# EAGLE board measures_wrover_0.8_JLCPCB (EAGLE 9.6.2)
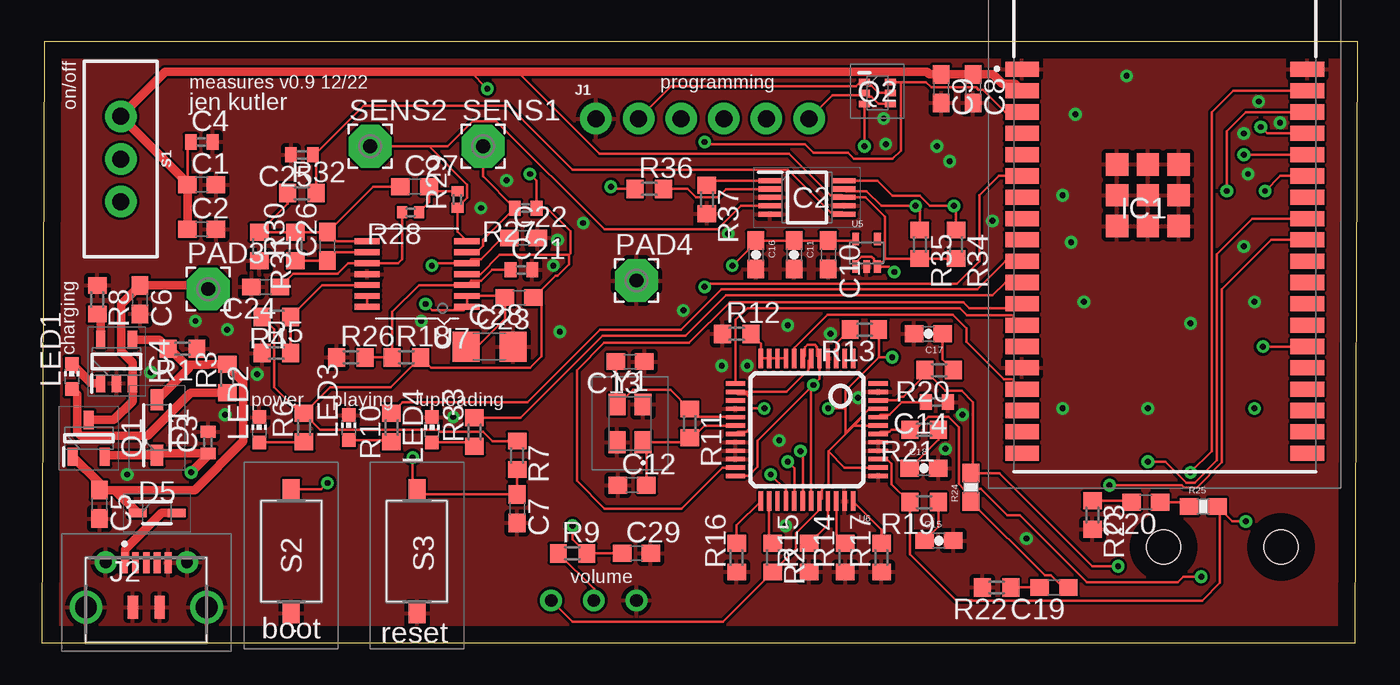
[diagram p0: board, top side]
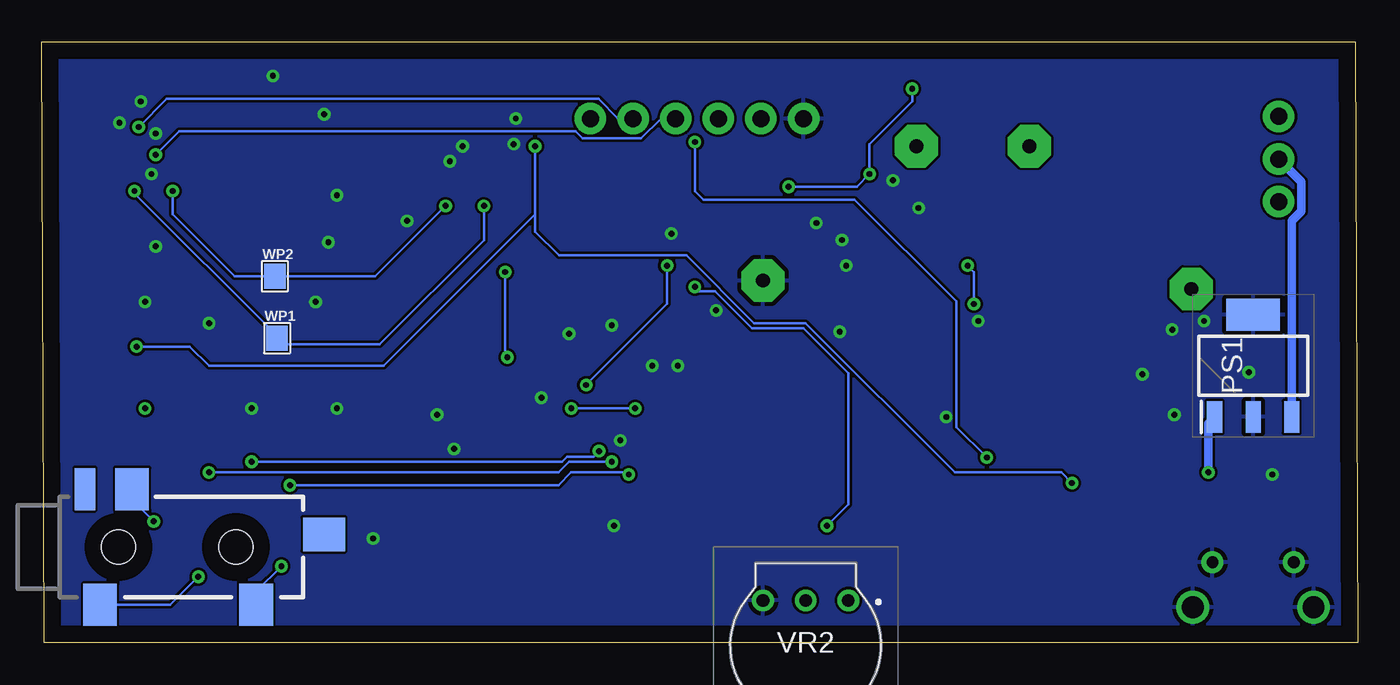
[diagram p1: board, bottom side, seen from below]

Size 78.41 x 35.8 mm. Coordinates in mm from the lower left corner, seen from the top.
Outline: 0,0 78.28,0 78.41,35.8 0.13,35.8 0,0
Copper layers (1*16): Top 0.035mm / dielectric 1.5mm / Bottom 0.035mm
Design rules "default": minimum track width 6mil, minimum drill 0.35mm, track to track 6mil, track to pad 6mil, pad to pad 6mil, via to via 6mil, smd to smd 6mil, copper to edge 40mil, drill to drill 6mil, minimum pad ring 10mil, minimum via ring 8mil, stop-mask expansion 4mil, vias tented up to drill 0mil, thermal gap 10mil

## Footprints (pad centres in the part's own frame; a part is rotated, then mirrored left to right if it is on the bottom)
C0603 = smd 1.1 x 1: 1 -0.85,0; 2 0.85,0
C0402 = smd 0.7 x 0.9: 1 -0.65,0; 2 0.65,0
0603-CAP = smd 1.1 x 1: 1 -0.85,0; 2 0.85,0
C1206 = smd 1.6 x 1.8: 1 -1.4,0; 2 1.4,0
SOD3716X125N = smd 1.25 x 0.75: 1 -1.65,0; 2 1.65,0
SOD2513X120N = smd 1.075 x 0.5: 1 -1.162,0; 2 1.162,0
ESP32WROVERE = smd 2 x 0.9: 1 -7.5,7.5; 2 -7.5,6.23; 3 -7.5,4.96; 4 -7.5,3.69; 5 -7.5,2.42; 6 -7.5,1.15; 7 -7.5,-0.12; 8 -7.5,-1.39; 9 -7.5,-2.66; 10 -7.5,-3.93; 11 -7.5,-5.2; 12 -7.5,-6.47; 13 -7.5,-7.74; 14 -7.5,-9.01; 15 -7.5,-10.28; 16 -7.5,-11.55; 17 -7.5,-12.82; 18 -7.5,-14.09; 19 -7.5,-15.36; 20 9.5,-15.36; 21 9.5,-14.09; 22 9.5,-12.82; 23 9.5,-11.55; 24 9.5,-10.28; 25 9.5,-9.01; 26 9.5,-7.74; 27 9.5,-6.47; 28 9.5,-5.2; 29 9.5,-3.93; 30 9.5,-2.66; 31 9.5,-1.39; 32 9.5,-0.12; 33 9.5,1.15; 34 9.5,2.42; 35 9.5,3.69; 36 9.5,4.96; 37 9.5,6.23; 38 9.5,7.5 | smd 1.33 x 1.33: 39 0,0; 40 -1.835,1.835; 41 -1.835,0; 42 -1.835,-1.835; 43 0,-1.835; 44 1.835,-1.835; 45 1.835,0; 46 1.835,1.835; 47 0,1.835
SOP50P490X110-10N = smd 1.4 x 0.3: 1 -2.2,1; 2 -2.2,0.5; 3 -2.2,0; 4 -2.2,-0.5; 5 -2.2,-1; 6 2.2,-1; 7 2.2,-0.5; 8 2.2,0; 9 2.2,0.5; 10 2.2,1
SOT95P280X100-5N = smd 1.05 x 0.55: 1 -1.3,0.95; 2 -1.3,0; 3 -1.3,-0.95; 4 1.3,-0.95; 5 1.3,0.95
1X06_NO_SILK = drill 1.016 pad 1.88: 1 0,0; 2 2.54,0; 3 5.08,0; 4 7.62,0; 5 10.16,0; 6 12.7,0
MICROXNJ = smd 0.4 x 1.25: 1 1.3,-4.775; 2 0.65,-4.775; 3 0,-4.775; 4 -0.65,-4.775; 5 -1.3,-4.775 | drill 0.7 pad 1.3: MH1 2.425,-4.8; MH2 -2.425,-4.8 | drill 1.3 pad 1.9: MH3 3.6,-2.13; MH4 -3.6,-2.13 | smd 0.6 x 1.35: MP1 0.8,-2.125; MP2 -0.8,-2.125
AUDIO-JACK-3.5MM-SMD = smd 2 x 2.5: RING 4.3,3.45; SLEEVE 2.4,-3.45; TIP 11.7,-3.45 | smd 1.2 x 2.5: RSH 1.5,3.45 | smd 2.5 x 2: TSH 15.75,0.75 | hole 2: 3.5,0; 10.5,0
CHIP-LED0603 = smd 0.8 x 0.8: A 0,-0.75; C 0,0.75
2,54/0,8 = drill 0.813 pad 2.54 octagon: 1 0,0
SOT230P700X180-4N = smd 1.9 x 0.9: 1 -3.05,2.3; 2 -3.05,0; 3 -3.05,-2.3 | smd 1.9 x 3.2: 4 3.05,0
SOT95P240X115-3N = smd 1.1 x 0.6: 1 -1.1,0.95; 2 -1.1,-0.95; 3 1.1,0
UMH3NTN = smd 0.65 x 0.4: 1 -0.775,0.65; 2 -0.775,0; 3 -0.775,-0.65; 4 0.775,-0.65; 5 0.775,0; 6 0.775,0.65
R0603 = smd 1 x 1.1: 1 -0.85,0; 2 0.85,0
0603-RES = smd 1.1 x 1: 1 -0.85,0; 2 0.85,0
R0402 = smd 0.7 x 0.9: 1 -0.65,0; 2 0.65,0
R0402' = smd 0.6 x 0.7: 1 -0.5,0; 2 0.5,0
SWITCH_SPDT_PTH_11.6X4.0MM = drill 1.016 pad 1.88: 1 0,2.54; 2 0,0; 3 0,-2.54
TS1101CW = smd 1.2 x 1: 1 -3.7,0; 2 3.7,0
SC70 = smd 0.4 x 0.75: 1 -0.65,-0.825; 2 0,-0.825; 3 0.65,-0.825; 4 0.65,0.825; 5 -0.65,0.825
LQFP-48 = smd 0.254 x 1.143: 1 -2.75,-4.25; 2 -2.25,-4.25; 3 -1.75,-4.25; 4 -1.25,-4.25; 5 -0.75,-4.25; 6 -0.25,-4.25; 7 0.25,-4.25; 8 0.75,-4.25; 9 1.25,-4.25; 10 1.75,-4.25; 11 2.25,-4.25; 12 2.75,-4.25; 25 2.75,4.25; 26 2.25,4.25; 27 1.75,4.25; 28 1.25,4.25; 29 0.75,4.25; 30 0.25,4.25; 31 -0.25,4.25; 32 -0.75,4.25; 33 -1.25,4.25; 34 -1.75,4.25; 35 -2.25,4.25; 36 -2.75,4.25 | smd 1.143 x 0.254: 13 4.25,-2.75; 14 4.25,-2.25; 15 4.25,-1.75; 16 4.25,-1.25; 17 4.25,-0.75; 18 4.25,-0.25; 19 4.25,0.25; 20 4.25,0.75; 21 4.25,1.25; 22 4.25,1.75; 23 4.25,2.25; 24 4.25,2.75; 37 -4.25,2.75; 38 -4.25,2.25; 39 -4.25,1.75; 40 -4.25,1.25; 41 -4.25,0.75; 42 -4.25,0.25; 43 -4.25,-0.25; 44 -4.25,-0.75; 45 -4.25,-1.25; 46 -4.25,-1.75; 47 -4.25,-2.25; 48 -4.25,-2.75
TSSOP14 = smd 0.35 x 1.5: 1 -1.95,-2.975; 2 -1.3,-2.975; 3 -0.65,-2.975; 4 0,-2.975; 5 0.65,-2.975; 6 1.3,-2.975; 7 1.95,-2.975; 8 1.95,2.975; 9 1.3,2.975; 10 0.65,2.975; 11 0,2.975; 12 -0.65,2.975; 13 -1.3,2.975; 14 -1.95,2.975
3352T1103LF = drill 0.76 pad 1.303: 1 0,0.01; 2 2.54,0.01; 3 5.08,0.01
WPAD-1-0805 = smd 1.3 x 1.5: 1 -0.015,0
SXT32422AA48 = smd 1 x 1.3: 1 -0.775,1.125; 2 -0.775,-1.125; 3 0.775,-1.125; 4 0.775,1.125

## Placement (x,y rotation side)
C1  10uF  [C0603]  9.52,27.3 0 top
C2  100nF  [C0603]  9.52,24.64 0 top
C3  1uF  [C0402]  9.91,11.94 90 top
C4  1uF  [C0402]  9.52,29.84 0 top
C5  10uF  [C0603]  3.43,8.26 270 top
C6  10uF  [C0603]  5.84,20.45 270 top
C7  100nF  [C0603]  28.32,8 270 top
C8  10uF  [C0603]  55.5,33.02 270 top
C9  100nF  [C0603]  53.59,33.02 270 top
C10  10uF  [C0603]  46.86,23.11 270 top
C11  0.1uF  [0603-CAP]  44.83,23.11 270 top
C12  22pF  [C0603]  35.18,9.4 0 top
C13  22pF  [C0603]  35.05,16.76 180 top
C14  1.0uF  [C0402]  53.34,14.35 180 top
C15  10nF  [0603-CAP]  53.47,6.1 0 top
C16  0.1uF  [0603-CAP]  42.55,23.11 270 top
C17  10nF  [0603-CAP]  52.83,18.41 180 top
C18  47nF  [0603-CAP]  52.58,10.41 0 top
C19  10uF  [C0603]  60.33,3.3 180 top
C20  10uF  [C0603]  65.79,8.38 180 top
C21  1uF  [C0402]  28.58,22.23 0 top
C22  100nF  [C0603]  28.7,24.13 0 top
C23  100nF  [C0603]  28.45,20.57 180 top
C24  1uF  [C0603]  13.34,21.21 180 top
C25  1uF  [C0402]  15.49,29.08 180 top
C26  1nF  [C0603]  17.02,23.62 90 top
C27  1uF  [C0603]  22.23,27.18 0 top
C28  47uF  [C1206]  26.67,17.65 0 top
C29  C_1UF/50V_0603  [C0603]  35.43,5.33 0 top
D1  B5819W  [SOD3716X125N]  6.86,12.83 90 top
D5  BAT760-7  [SOD2513X120N]  6.86,7.75 0 top
IC1  ESP32-WROVER-E  [ESP32WROVERE]  65.91,26.67 0 top
IC2  ADS1115IDGSR  [SOP50P490X110-10N]  45.59,26.54 0 top
IC4  TP4054-42-SOT25-R  [SOT95P280X100-5N]  4.45,16.76 90 top
J1  [1X06_NO_SILK]  33.02,31.24 0 top
J2  MICROXNJ  [MICROXNJ]  6.22,0 180 top
JP1  3.5mm Headphone Jack  [AUDIO-JACK-3.5MM-SMD]  77.34,5.71 0 bottom
LED1  Charge  [CHIP-LED0603]  1.78,15.88 0 top
LED2  Power  [CHIP-LED0603]  12.95,12.7 0 top
LED3  Power  [CHIP-LED0603]  18.29,12.83 0 top
LED4  Power  [CHIP-LED0603]  23.24,12.7 0 top
PAD3  [2,54/0,8]  9.91,21.08 0 top
PAD4  [2,54/0,8]  35.43,21.59 0 top
PS1  AP2114HA-3.3TRG1  [SOT230P700X180-4N]  6.22,16.51 90 bottom
Q1  CJ2301_S1  [SOT95P240X115-3N]  2.79,12.19 90 top
Q2  UMH3NTN  [UMH3NTN]  49.78,32.77 0 top
R1  100k  [R0603]  8.38,17.53 180 top
R2  100k  [R0603]  43.56,5.08 270 top
R3  2k  [R0603]  11.05,15.75 90 top
R4  100k  [R0603]  13.97,19.43 180 top
R5  100k  [R0603]  13.97,17.27 0 top
R6  2k  [R0603]  15.62,12.83 90 top
R7  10k  [R0603]  28.32,11.18 270 top
R8  2k  [R0603]  3.3,20.45 270 top
R9  R_150K_0603  [R0603]  31.62,5.33 0 top
R10  2k  [R0603]  20.83,12.83 90 top
R11  1M  [R0603]  38.61,13.08 270 top
R12  100k  [R0603]  41.4,18.41 0 top
R13  100k  [R0603]  49.02,18.67 180 top
R14  100k  [R0603]  47.88,5.08 90 top
R15  100k  [R0603]  45.72,5.08 90 top
R16  100k  [R0603]  41.4,5.08 90 top
R17  100k  [R0603]  50.04,5.08 90 top
R18  100k  [R0603]  21.72,17.02 0 top
R19  20  [R0603]  52.58,8.38 180 top
R20  20  [R0603]  53.47,16.26 180 top
R21  10  [R0603]  52.58,12.7 180 top
R22  10K  [R0603]  56.9,3.3 180 top
R23  10K  [R0603]  62.61,7.62 270 top
R24  470  [0603-RES]  55.37,9.27 90 top
R25  470  [0603-RES]  69.22,8.13 0 top
R26  100k  [R0603]  18.41,17.02 0 top
R27  825k  [R0402]  28.83,25.91 180 top
R28  150k  [R0402']  21.97,25.65 180 top
R29  75k  [R0402']  24.77,26.42 90 top
R30  10k  [R0603]  15.11,23.62 90 top
R31  10k  [R0603]  12.95,23.62 270 top
R32  110k  [R0603]  15.49,26.8 0 top
R33  2k  [R0603]  25.78,12.57 90 top
R34  10k  [R0603]  54.48,23.75 270 top
R35  10k  [R0603]  52.32,23.75 270 top
R36  10k  [R0603]  36.2,27.05 0 top
R37  10k  [R0603]  39.62,26.42 270 top
S1  [SWITCH_SPDT_PTH_11.6X4.0MM]  4.7,28.83 180 top
S2  TS-1101-C-W  [TS1101CW]  14.86,5.46 90 top
S3  TS-1101-C-W  [TS1101CW]  22.35,5.46 90 top
SENS1  [2,54/0,8]  26.29,29.59 0 top
SENS2  [2,54/0,8]  19.56,29.59 0 top
U5  1.8V  [SC70]  49.15,23.24 0 top
U6  VS1053  [LQFP-48]  45.59,12.7 180 top
U7  AD8608ARUZ  [TSSOP14]  22.35,21.97 90 top
VR2  3352T-1-103LF  [3352T1103LF]  30.35,2.54 180 bottom
WP1  SDA21  [WPAD-1-0805]  64.39,18.16 0 bottom
WP2  SCL22  [WPAD-1-0805]  64.52,21.84 0 bottom
Y1  SXT32422AA48  [SXT32422AA48]  35.05,13.08 180 top

## Library data of the parts
C1 C5 C6 C8 C10 C19 C20 = JLC PCB Basic Parts_loc; LCSC_DATASHEET: https://datasheet.lcsc.com/lcsc/1811110921_Samsung-Electro-Mechanics-CL10A106MA8NRNC_C96446.pdf; LCSC_PART: C96446; LCSC_ROTATION_CCW: 0; LCSC_STOCK: 119091; PROPERTIES: X5R 25V ±20% 10uF 0603 ROHS
C2 C7 C9 C22 C23 = JLC PCB Basic Parts_loc; LCSC_DATASHEET: https://datasheet.lcsc.com/lcsc/1809301912_YAGEO-CC0603KRX7R9BB104_C14663.pdf; LCSC_PART: C14663; LCSC_ROTATION_CCW: 0; LCSC_STOCK: 7111530; PROPERTIES: 50V 100nF X7R ±10% 0603 ROHS
C3 C4 C14 C21 C25 = JLC PCB Basic Parts_loc; LCSC_DATASHEET: https://datasheet.lcsc.com/lcsc/1811091611_Samsung-Electro-Mechanics-CL05A105KA5NQNC_C52923.pdf; LCSC_PART: C52923; LCSC_ROTATION_CCW: 0; LCSC_STOCK: 6404174; PROPERTIES: 25V 1uF X5R ±10% 0402 ROHS
C11 C16 = SparkFun-Capacitors; PROD_ID: CAP-00810
C12 C13 = JLC PCB Basic Parts_loc; LCSC_DATASHEET: https://datasheet.lcsc.com/lcsc/1810261515_Samsung-Electro-Mechanics-CL10C120JB8NNNC_C38523.pdf; LCSC_PART: C38523; LCSC_ROTATION_CCW: 0; LCSC_STOCK: 87030; PROPERTIES: 50V 12pF C0G ±5% 0603 ROHS
C15 C17 = SparkFun-Capacitors; PROD_ID: CAP-00867
C18 = SparkFun-Capacitors; PROD_ID: CAP-08605
C24 C27 C29 = JLC PCB Basic Parts_loc; LCSC_DATASHEET: https://datasheet.lcsc.com/lcsc/1810261812_Samsung-Electro-Mechanics-CL10A105KB8NNNC_C15849.pdf; LCSC_PART: C15849; LCSC_ROTATION_CCW: 0; LCSC_STOCK: 14650365; PROPERTIES: 50V 1uF X5R ±10% 0603 ROHS
C26 = JLC PCB Basic Parts_loc; LCSC_DATASHEET: https://datasheet.lcsc.com/lcsc/1811071810_Samsung-Electro-Mechanics-CL10B102KB8NNNC_C1588.pdf; LCSC_PART: C1588; LCSC_ROTATION_CCW: 0; LCSC_STOCK: 2243141; PROPERTIES: 50V 1nF X7R ±10% 0603 ROHS
C28 = JLC PCB Basic Parts_loc; LCSC_DATASHEET: https://datasheet.lcsc.com/lcsc/1810221121_Samsung-Electro-Mechanics-CL31A476MPHNNNE_C96123.pdf; LCSC_PART: C96123; LCSC_ROTATION_CCW: 0; LCSC_STOCK: 279828; PROPERTIES: 10V 47uF X5R ±20% 1206 ROHS
D1 = B5819W; DESCRIPTION: 40V 1A 600mV @ 1A SOD-123 Schottky Barrier Diodes (SBD); HEIGHT: 1.25mm; MANUFACTURER_NAME: Changjiang Electronics Tech (CJ); MANUFACTURER_PART_NUMBER: B5819W
D5 = BAT760-7; ARROW_PART_NUMBER: BAT760-7; ARROW_PRICE-STOCK: https://www.arrow.com/en/products/bat760-7/diodes-incorporated?region=europe; DESCRIPTION: Diode Schottky 30V 1A 2Pin SOD323 Diodes Inc BAT760-7, SMT Schottky Diode, 30V 1A, 2-Pin SOD-323; HEIGHT: 1.2mm; MANUFACTURER_NAME: Diodes Inc.; MANUFACTURER_PART_NUMBER: BAT760-7; MOUSER_PART_NUMBER: 621-BAT760-7; MOUSER_PRICE-STOCK: https://www.mouser.co.uk/ProductDetail/Diodes-Incorporated/BAT760-7?qs=JV7lzlMm3yKDDyO09xoRbQ%3D%3D
IC1 = ESP32-WROVER-E; DESCRIPTION: Module: IoT; Bluetooth Low Energy,WiFi; PCB; SMD; 18x31.4x3.3mm; HEIGHT: 3.45mm; MANUFACTURER_NAME: Espressif Systems; MANUFACTURER_PART_NUMBER: ESP32-WROVER-E
IC2 = ADS1115IDGSR; ARROW_PART_NUMBER: ADS1115IDGSR; ARROW_PRICE-STOCK: https://www.arrow.com/en/products/ads1115idgsr/texas-instruments?region=nac; DESCRIPTION: 16-Bit 860SPS 4-Ch Delta-Sigma ADC With PGA, Oscillator, Vref, Comparator, and I2C; HEIGHT: 1.1mm; MANUFACTURER_NAME: Texas Instruments; MANUFACTURER_PART_NUMBER: ADS1115IDGSR; MOUSER_PART_NUMBER: 595-ADS1115IDGSR; MOUSER_PRICE-STOCK: https://www.mouser.co.uk/ProductDetail/Texas-Instruments/ADS1115IDGSR?qs=IK5e5L0zOXjKCJoVMhYO%2FQ%3D%3D
IC4 = TP4054-42-SOT25-R; DESCRIPTION: Standalone Linear Li-ion Battery Charger with Thermal Regulation, SOT-23-5; HEIGHT: 1mm; MANUFACTURER_NAME: TOP POWER; MANUFACTURER_PART_NUMBER: TP4054-42-SOT25-R
J1 = SparkFun-Connectors; PROD_ID: CONN-08437
J2 = MICROXNJ; DESCRIPTION: MICRO-USB-SMD_MICROXNJ; HEIGHT: 2.425mm; MANUFACTURER_NAME: Shou Han; MANUFACTURER_PART_NUMBER: MICROXNJ
JP1 = SparkFun-Connectors; PROD_ID: CONN-10353
LED1-LED4 R27 = adafruit
PAD3 PAD4 SENS1 SENS2 = wirepad
PS1 = AP2114HA-3.3TRG1; ARROW_PART_NUMBER: AP2114HA-3.3TRG1; ARROW_PRICE-STOCK: https://www.arrow.com/en/products/ap2114ha-3.3trg1/diodes-incorporated; DESCRIPTION: LDO Voltage Regulators 1A LN CMOS LDO 0.45V 60uA 50mA; HEIGHT: 1.8mm; MANUFACTURER_NAME: Diodes Inc.; MANUFACTURER_PART_NUMBER: AP2114HA-3.3TRG1; MOUSER_PART_NUMBER: 621-AP2114HA-3.3TRG1; MOUSER_PRICE-STOCK: https://www.mouser.co.uk/ProductDetail/Diodes-Incorporated/AP2114HA-33TRG1?qs=M%2FOdCRO8QQ3KWhA9Gt6VoQ%3D%3D
Q1 = CJ2301_S1; DESCRIPTION: MOSFET P Trench 20V 2.3A 1V @ 250uA 112 m @ 2.8A,4.5V SOT-23(SOT-23-3) RoHS; HEIGHT: 1.15mm; MANUFACTURER_NAME: Changjiang Electronics Tech (CJ); MANUFACTURER_PART_NUMBER: CJ2301 S1
Q2 = UMH3NTN; ARROW_PART_NUMBER: UMH3NTN; ARROW_PRICE-STOCK: https://www.arrow.com/en/products/umh3ntn/rohm-semiconductor?region=nac; DESCRIPTION: Bipolar Transistors - Pre-Biased DUAL NPN 50V 100MA SOT-363; HEIGHT: 1mm; MANUFACTURER_NAME: ROHM Semiconductor; MANUFACTURER_PART_NUMBER: UMH3NTN; MOUSER_PART_NUMBER: 755-UMH3NTN; MOUSER_PRICE-STOCK: https://www.mouser.co.uk/ProductDetail/ROHM-Semiconductor/UMH3NTN?qs=4kLU8WoGk0st6ahJ6z2bmw%3D%3D
R1 R2 R4 R5 R12-R18 R26 = JLC PCB Basic Parts_loc; LCSC_DATASHEET: https://datasheet.lcsc.com/lcsc/2110260030_UNI-ROYAL-Uniroyal-Elec-0603WAF1003T5E_C25803.pdf; LCSC_PART: C25803; LCSC_ROTATION_CCW: 0; LCSC_STOCK: 5826279; PROPERTIES: ±1% 1/10W Thick Film Resistors 75V ±100ppm -55°C~+155°C 100kOhm 0603 ROHS
R3 R6 R8 R10 R33 = JLC PCB Basic Parts_loc; LCSC_DATASHEET: https://datasheet.lcsc.com/lcsc/2110252130_UNI-ROYAL-Uniroyal-Elec-0603WAF2001T5E_C22975.pdf; LCSC_PART: C22975; LCSC_ROTATION_CCW: 0; LCSC_STOCK: 3372290; PROPERTIES: ±1% 1/10W Thick Film Resistors 75V ±100ppm -55°C~+155°C 2kOhm 0603 ROHS
R7 R22 R23 R30 R31 R34-R37 = JLC PCB Basic Parts_loc; LCSC_DATASHEET: https://datasheet.lcsc.com/lcsc/2110260030_UNI-ROYAL-Uniroyal-Elec-0603WAF1002T5E_C25804.pdf; LCSC_PART: C25804; LCSC_ROTATION_CCW: 0; LCSC_STOCK: 7979018; PROPERTIES: ±1% 1/10W Thick Film Resistors 75V ±100ppm -55°C~+155°C 10kOhm 0603 ROHS
R9 = JLC PCB Basic Parts_loc; LCSC_DATASHEET: https://datasheet.lcsc.com/lcsc/2110252030_UNI-ROYAL-Uniroyal-Elec-0603WAF1503T5E_C22807.pdf; LCSC_PART: C22807; LCSC_ROTATION_CCW: 0; LCSC_STOCK: 285183; PROPERTIES: ±1% 1/10W Thick Film Resistors 75V ±100ppm -55°C~+155°C 150kOhm 0603 ROHS
R11 = JLC PCB Basic Parts_loc; LCSC_DATASHEET: https://datasheet.lcsc.com/lcsc/2110252030_UNI-ROYAL-Uniroyal-Elec-0603WAF1004T5E_C22935.pdf; LCSC_PART: C22935; LCSC_ROTATION_CCW: 0; LCSC_STOCK: 1411723; PROPERTIES: ±1% 1/10W Thick Film Resistors 75V ±100ppm -55°C~+155°C 1MOhm 0603 ROHS
R19 R20 = JLC PCB Basic Parts_loc; LCSC_DATASHEET: https://datasheet.lcsc.com/lcsc/2110252030_UNI-ROYAL-Uniroyal-Elec-0603WAF200JT5E_C22950.pdf; LCSC_PART: C22950; LCSC_ROTATION_CCW: 0; LCSC_STOCK: 40713; PROPERTIES: ±1% 1/10W Thick Film Resistors 75V ±100ppm -55°C~+155°C 20Ohm 0603 ROHS
R21 = JLC PCB Basic Parts_loc; LCSC_DATASHEET: https://datasheet.lcsc.com/lcsc/2110252030_UNI-ROYAL-Uniroyal-Elec-0603WAF100JT5E_C22859.pdf; LCSC_PART: C22859; LCSC_ROTATION_CCW: 0; LCSC_STOCK: 2733989; PROPERTIES: ±1% 1/10W Thick Film Resistors 75V ±400ppm -55°C~+155°C 10Ohm 0603 ROHS
R24 R25 = SparkFun-Resistors; PROD_ID: RES-07869
R28 = JLC PCB Basic Parts_loc; LCSC_DATASHEET: https://datasheet.lcsc.com/lcsc/2110260030_UNI-ROYAL-Uniroyal-Elec-0402WGF1503TCE_C25755.pdf; LCSC_PART: C25755; LCSC_ROTATION_CCW: 0; LCSC_STOCK: 128267; PROPERTIES: ±1% 1/16W Thick Film Resistors 50V ±100ppm -55°C~+155°C 150kOhm 0402 ROHS
R29 = JLC PCB Basic Parts_loc; LCSC_DATASHEET: https://datasheet.lcsc.com/lcsc/2110260030_UNI-ROYAL-Uniroyal-Elec-0402WGF7502TCE_C25798.pdf; LCSC_PART: C25798; LCSC_ROTATION_CCW: 0; LCSC_STOCK: 100400; PROPERTIES: ±1% 1/16W Thick Film Resistors 50V ±100ppm -55°C~+155°C 75kOhm 0402 ROHS
R32 = JLC PCB Basic Parts_loc; LCSC_DATASHEET: https://datasheet.lcsc.com/lcsc/2110260030_UNI-ROYAL-Uniroyal-Elec-0603WAF1103T5E_C25805.pdf; LCSC_PART: C25805; LCSC_ROTATION_CCW: 0; LCSC_STOCK: 86411; PROPERTIES: ±1% 1/10W Thick Film Resistors 75V ±100ppm -55°C~+155°C 110kOhm 0603 ROHS
S1 = SparkFun-Switches; PROD_ID: SWCH-08261; SF_SKU: COM-00102
S2 S3 = TS-1101-C-W; DESCRIPTION: tact switch 3x6x2.5 stick flat foot white button 260GF; HEIGHT: 2.6mm; MANUFACTURER_NAME: XKB Connectivity; MANUFACTURER_PART_NUMBER: TS-1101-C-W
U5 = SparkFun-PowerIC; PROD_ID: VREG-08428
U6 = SparkFun-DigitalIC; PROD_ID: IC-08983
U7 = AD8608ARUZ; AVAILABILITY: In Stock; DESCRIPTION: CMOS Amplifier 4 Circuit Rail-to-Rail 14-TSSOP; MF: Analog Devices; MP: AD8608ARUZ; PACKAGE: TSSOP-14 Analog Devices; PRICE: None
VR2 = 3352T-1-103LF; ARROW_PART_NUMBER: 3352T-1-103LF; ARROW_PRICE-STOCK: https://www.arrow.com/en/products/3352t-1-103lf/bourns; DESCRIPTION: Trimmer Resistors - Through Hole; HEIGHT: 5.33mm; MANUFACTURER_NAME: Bourns; MANUFACTURER_PART_NUMBER: 3352T-1-103LF; MOUSER_PART_NUMBER: 652-3352T-1-103LF; MOUSER_PRICE-STOCK: https://www.mouser.co.uk/ProductDetail/Bourns/3352T-1-103LF?qs=EYTJzGwugUoW6t2SAeQ12A%3D%3D
WP1 WP2 = PatternAgents-ProtoPads; BOM: EXCLUDE
Y1 = SXT32422AA48; DESCRIPTION: 32MHz +/-50ppm Crystal 22pF 40 Ohms 4-SMD, No Lead; HEIGHT: 0.8mm; MANUFACTURER_NAME: Suntsu; MANUFACTURER_PART_NUMBER: SXT32422AA48

## Nets
1.8V: C10.1 C11.1 C16.1 U5.5 U6.5 U6.7 U6.24 U6.31
3.3V: C1.1 C2.1 C4.1 C8.1 C9.1 C23.1 IC1.2 IC2.8 R2.2 R4.2 R6.2 R7.1 R13.1 R18.2 R27.1 R34.2 R35.2 R36.1 S1.3 U5.1 U5.3 U6.6 U6.14 U6.19 U6.32 U6.38 U6.43 U6.45 U7.4 VR2.1
AIN0: IC2.4 R29.1 SENS2.1 U7.7
AIN1: C25.1 IC2.6 R32.2
DTR: J1.6 Q2.2 Q2.4
G1: R12.2 U6.9 U6.10 U6.11 U6.12
G2: R16.2 U6.25
GBUF: JP1.SLEEVE R21.2 U6.42
GND: C1.2 C2.2 C3.2 C4.2 C5.2 C6.2 C7.2 C8.2 C9.2 C10.2 C11.2 C12.1 C13.1 C14.1 C15.2 C16.2 C17.2 C18.2 C21.2 C22.2 C24.2 C25.2 C28.2 C29.2 IC1.1 IC1.15 IC1.38 IC1.39 IC1.40 IC1.41 IC1.42 IC1.43 IC1.44 IC1.45 IC1.46 IC1.47 IC2.3 IC2.5 IC2.7 IC4.2 J1.1 J2.5 J2.MH1 J2.MH2 J2.MH3 J2.MH4 J2.MP1 J2.MP2 LED2.C LED3.C LED4.C PAD4.1 PS1.2 PS1.4 R1.1 R5.1 R8.1 R12.1 R14.1 R15.1 R16.1 R17.1 R22.2 R23.2 R26.1 R31.2 R37.2 S2.1 S3.1 U5.2 U6.4 U6.16 U6.20 U6.21 U6.22 U6.35 U6.37 U6.40 U6.41 U6.47 U7.11 VR2.3 Y1.2 Y1.4
GPIO0: R15.2 U6.33
GPIO1: R14.2 U6.34
GPIO4: R17.2 U6.36
I35: IC1.7
IO0: IC1.25 Q2.3 S2.2
IO21: IC1.33 IC2.9 R35.1 WP1.1
IO22: IC1.36 IC2.10 R34.1 WP2.1
LEFT: JP1.TIP R20.2 R24.2 U6.46
MIDI-RX: R2.1 U6.26
MISO: IC1.31 U6.30
MOSI: IC1.37 U6.29
MP3-CS: IC1.12 U6.23
MP3-DCS: IC1.13 U6.13
MP3-DREQ: IC1.16 U6.8
MP3-RST: R13.2 U6.3
N$1: PS1.3 S1.2
N$2: C3.1 D1.1 PS1.1 Q1.2
N$3: LED2.A R6.1
N$4: IC4.1 LED1.C
N$5: LED1.A R3.1
N$6: D5.2 J2.1
N$7: IC4.5 R8.2
N$8: R9.1 VR2.2
N$9: R4.1 R5.2 U7.12
N$10: U7.13 U7.14
N$11: IC1.10 R10.2
N$12: IC1.11 R33.2
N$13: C12.2 R11.2 U6.18 Y1.1
N$14: C13.2 R11.1 U6.17 Y1.3
N$15: C18.1 R21.1
N$16: C17.1 R20.1
N$17: C15.1 R19.1
N$18: C20.1 R25.1
N$19: C19.1 R24.1
N$20: C21.1 R18.1 R26.2 U7.3
N$21: C22.1 C23.2 C28.1 U7.1 U7.2 U7.5
N$22: R27.2 SENS1.1 U7.6
N$23: C24.1 R28.2 U7.10
N$24: C26.2 C27.1 R30.2 R31.1 R32.1 U7.8
N$25: C26.1 R30.1 U7.9
N$26: C27.2 R28.1 R29.2
N$27: LED3.A R10.1
N$28: LED4.A R33.1
N$29: IC2.2 R36.2
N$30: IC2.1 R37.1
RCAP: C14.2 U6.44
RESET: C7.1 IC1.3 Q2.6 R7.2 S3.2
RIGHT: JP1.RING R19.2 R25.2 U6.39
RTS: J1.2 Q2.1 Q2.5
RX: IC1.34 J1.4
SCK: IC1.30 U6.28
SPKR-L: C19.2 R22.1
SPKR-R: C20.2 R23.1
TX: IC1.35 J1.5
V_BATT: C6.1 IC4.3 PAD3.1 Q1.3
V_USB: C5.1 D1.2 D5.1 IC4.4 Q1.1 R1.2 R3.2
VOL: C29.1 IC1.6 R9.2

## Tracks (layer width: path | path; a pad name or v marks a point on that pad's centre or on a via)
1.8V  (via drill 0.35)
  Top 0.152: U5.5 48.4,23.96 C10.1 C11.1 42.63,23.96 42.55,23.88 | U6.7 45.49,17.09 45.49,17.62 45.62,17.75 46.06,17.75 46.2,17.62 46.2,17.09 U6.5 46.34,15.74 v45.97,15.37 | v45.97,15.37 45.84,15.24 U6.31 | v45.97,15.37 42.65,12.04 42.65,10.48 42.14,9.97 41.36,9.97 U6.24 | v41.15,22.48 42.55,23.88 | 42.55,23.88 C16.1
  Bottom 0.152: v41.15,22.48 41.15,20.19 v45.97,15.37
3.3V  (via drill 0.35)
  Top 0.152: U6.38 47.84,10.45 46.86,11.43 | 46.86,11.43 48.38,12.95 | 48.38,12.95 U6.43 | 48.38,12.95 49.04,13.61 49.04,13.67 | 49.04,13.67 47.9,12.53 47.9,13.97 | 49.04,13.67 49.32,13.95 U6.45 | 46.86,11.43 46.86,9.49 46.49,9.12 46.49,8.59 U6.32 46.34,7.93 44.94,6.53 44.94,5.61 R2.2 40.6,1.27 31.61,1.27 VR2.1 | U6.19 41.49,12.59 42.01,12.59 42.14,12.73 42.14,13.97 | 42.14,13.97 42.14,14.67 42.01,14.81 41.49,14.81 U6.14 44.36,14.95 45.7,16.28 45.7,16.81 U6.6 | U5.3 49.58,22.64 49.58,22.89 49.44,23.02 48.85,23.02 48.5,22.66 U5.1 | U5.3 50.23,22.84 50.23,25.4 49.09,26.54 IC2.8 47.67,26.66 47,26.66 44.53,29.13 33.22,29.13 28.34,34.02 27.81,34.02 | U5.3 50.28,22.9 R35.2 R34.2 | U7.4 26.14,21.97 27.29,23.11 31.41,23.11 | R4.2 13.85,18.7 13.85,16.63 13.84,16.62 13.84,15.24 15.41,13.68 R6.2 | R6.2 17.18,15.24 20.79,15.24 R18.2 23.2,16.38 29.08,16.38 29.78,17.08 29.78,20.09 C23.1 30.6,21.87 30.73,21.87 31.41,22.55 31.41,23.11 | 49.87,17.01 R13.1 | 49.87,17.01 47.9,15.04 47.9,13.97 | R7.1 26.85,12.03 26.3,12.58 23.74,12.58 23.61,12.71 16.59,12.71 R6.2 | 25.27,34.02 25.54,34.02 v26.54,33.02 | v33.91,27.18 34.04,27.05 R36.1 | v29.08,27.94 29.48,27.54 R27.1 30.11,25.91 31.5,24.53 31.5,23.2 31.41,23.11 | C1.1 8.68,29.64 C4.1 | v43.05,13.97 42.14,13.97 | v46.86,13.97 47.9,13.97 | v50.67,17.02 v50.66,17.01 49.87,17.01 | U5.3 50.48,22.42 v50.8,22.1
  Top 0.508: C2.1 C1.1 8.68,27.39 S1.3 7.35,34.02 25.27,34.02 27.81,34.02 52.75,34.02 52.9,33.87 C9.1 C8.1 56.69,33.87 57.25,33.31 58,33.31 IC1.2
  Bottom 0.152: v26.54,33.02 26.54,32.26 29.08,29.72 v29.08,27.94 29.84,27.18 v33.91,27.18 | v43.05,13.97 v46.86,13.97 | v50.8,22.1 50.8,17.14 v50.67,17.02
AIN0
  Top 0.152: U7.7 24.77,24.48 R29.1 24.77,25.94 25.34,26.52 25.34,27.31 23.06,29.59 SENS2.1 24.17,29.59 25.67,31.09 27.08,31.09 33.53,24.64 40.26,24.64 41.66,26.04 IC2.4
AIN1
  Top 0.152: C25.1 16.2,29.03 | 16.2,29.03 16.34,28.88 R32.2 | 16.2,29.03 19.18,32 27.81,32 31.62,28.19 44.47,28.19 47,25.66 47.67,25.66 IC2.6
DTR
  Top 0.152: J1.6 47.12,32.64 48.88,32.64 Q2.2 49.23,32.55 49.43,32.55 49.86,32.12 Q2.4
G1
  Top 0.152: R12.2 42.84,17.82 U6.12 U6.10 | U6.11 U6.10 | U6.10 U6.9
G2
  Top 0.152: U6.25 41.4,7.01 R16.2
GBUF  (via drill 0.35)
  Top 0.152: U6.42 49.99,12.59 50.51,12.59 50.61,12.7 R21.2 52.06,12.7 52.83,13.48 54.02,13.48 54.64,12.86 54.64,9.48 54.92,9.2 55.97,9.2 57.55,7.62 58.29,7.62 62.29,3.62 67.71,3.62 68.02,3.94 v69.09,3.94
  Bottom 0.152: JP1.SLEEVE 70.76,2.27 v69.09,3.94
GND  (via drill 0.35)
  other vias: 71.88,27.94 46.99,18.41 10.92,13.59 24.51,13.46 5.08,10.03 6.48,16.13 22.61,19.18 26.16,25.91 44.32,6.99 43.94,12.06 53.85,11.56 54.86,13.59 38.23,19.81 50.17,31.24 27.69,27.56 30.73,24 30.48,22.48 58.67,6.22 56.64,25.15 44.45,18.92 42.04,16.51 72.52,32.26 71.63,30.35 71.63,23.62 73.79,30.99 32.26,25.02 30.86,18.54 40.89,24.38 48.64,14.61 40.51,16.51 9.14,19.18 11.05,18.67 12.83,16 50.29,29.72 53.34,29.59 54.1,28.7 64.64,33.78 61.59,31.5 60.83,26.67 61.34,23.88 62.1,20.32 68.45,19.05 72.26,20.32 60.83,13.97 65.91,13.97
  pour Top: -0.13,35.56 78.61,35.56 78.61,0 -0.13,0
  pour Bottom: -0.13,35.56 78.61,35.56 78.61,0 -0.13,0
GPIO0
  Top 0.152: U6.33 46.84,7.05 R15.2
GPIO1
  Top 0.152: U6.34 47.34,6.47 R14.2
GPIO4
  Top 0.152: U6.36 50.04,6.75 R17.2
IO0  (via drill 0.35)
  Top 0.152: Q2.3 49.02,32.1 v49.02,29.59 | IC1.25 v72.78,17.66 v72.77,17.65 | S2.2 16.65,9.16 v17.02,9.53
  Bottom 0.152: v72.77,17.65 69.6,17.65 68.45,16.51 58.04,16.51 49.02,25.53 | v49.02,29.59 49.02,25.53 | 49.02,25.53 49.02,24.51 47.6,23.09 40.01,23.09 35.97,19.05 32.89,19.05 24,10.16 17.65,10.16 v17.02,9.53
IO21  (via drill 0.35)
  Top 0.152: IC1.33 73.79,27.82 v72.9,26.92 | R35.1 52.32,25.78 v52.07,26.04 50.02,26.04 49.14,26.92 47.91,26.92 IC2.9
  Bottom 0.152: v72.9,26.92 72.9,26.8 64.4,18.3 WP1.1 64.02,17.78 58.29,17.78 52.07,24 v52.07,26.04
IO22  (via drill 0.35)
  Top 0.152: IC1.36 71.76,31.63 70.61,30.48 v70.61,26.92 | R34.1 54.48,25.91 v54.36,26.04 52.93,26.04 52.32,26.64 50.7,26.64 49.8,27.54 IC2.10
  Bottom 0.152: v70.61,26.92 70.61,25.53 66.93,21.84 WP2.1 58.55,21.84 v54.36,26.04
LEFT  (via drill 0.35)
  Top 0.152: 52.79,16.09 53.84,15.03 54.82,15.03 55.5,14.35 55.5,10.25 R24.2 57.06,10.12 62.61,4.57 v64.14,4.57 | 52.79,16.09 R20.2 | U6.46 50.93,14.45 51.14,14.66 51.36,14.66 52.79,16.09
  Bottom 0.152: JP1.TIP 65.64,3.06 v64.14,4.57
MIDI-RX
  Top 0.152: U6.26 43.34,6.15 R2.1
MISO  (via drill 0.35)
  Top 0.152: U6.30 45.34,11.3 v45.21,11.43 | IC1.31 72.14,25.28 70.03,23.16 70.03,10.88 68.7,9.55 68.2,9.55 66.96,10.79 v65.91,10.79
  Bottom 0.152: v65.91,10.79 47.42,10.79 47.12,11.1 45.54,11.1 v45.21,11.43
MOSI  (via drill 0.35)
  Top 0.152: IC1.37 71,32.9 69.72,31.62 69.72,11.43 v68.45,10.16 | U6.29 44.84,10.4 v44.45,10.79
  Bottom 0.152: v68.45,10.16 47.62,10.16 46.99,10.79 v44.45,10.79
MP3-CS
  Top 0.152: IC1.12 58.16,19.95 55.28,19.95 54.92,20.3 41,20.3 38.58,17.87 33.5,17.87 31.88,16.26 31.88,9.65 33.53,8 38.12,8 40.55,10.43 41.33,10.43 U6.23
MP3-DCS
  Top 0.152: IC1.13 57.82,19.52 55.14,19.52 54.72,19.94 42.04,19.94 41.34,19.25 U6.13
MP3-DREQ
  Top 0.152: IC1.16 57.82,15.71 57.32,15.71 55.1,17.93 55.1,18.76 54.29,19.56 46.8,19.56 44.84,17.6 U6.8
MP3-RST
  Top 0.152: R13.2 47.34,17.84 U6.3
N$1
  Bottom 0.508: PS1.3 3.92,25.16 3.35,25.73 3.35,27.48 S1.2
N$2  (via drill 0.35)
  Top 0.508: Q1.2 3.83,11.18 D1.1 6.97,11.29 C3.1 9.91,11.18 v8.89,10.16
  Bottom 0.508: PS1.1 8.89,13.09 v8.89,10.16
N$3
  Top 0.152: LED2.A 15.59,11.95 R6.1
N$4
  Top 0.508: IC4.1 2.94,15.46 LED1.C
N$5
  Top 0.508: R3.1 8.85,14.9 6.29,12.34 2.33,12.34 2.09,12.57 2.09,14.81 LED1.A
N$6
  Top 0.508: J2.1 4.97,4.82 4.97,5.57 7.15,7.75 D5.2
N$7
  Top 0.508: IC4.5 3.5,19.4 R8.2
N$8
  Top 0.152: R9.1 32.89,3.21 VR2.2
N$9
  Top 0.152: R5.2 R4.1 16.71,21.32 U7.12
N$10
  Top 0.152: U7.14 U7.13
N$11
  Top 0.152: IC1.10 57.41,22.74 55.75,21.08 40.51,21.08 38.1,18.67 33.27,18.67 28.96,14.35 21.5,14.35 R10.2
N$12
  Top 0.152: IC1.11 57.41,21.47 56.64,20.7 40.77,20.7 38.35,18.29 33.4,18.29 28.54,13.42 R33.2
N$13
  Top 0.152: U6.18 39.49,12.95 38.77,12.23 R11.2 38.33,11.96 Y1.1 36.03,11.75 C12.2
N$14
  Top 0.152: U6.17 41.33,13.47 39.03,13.47 38.61,13.88 R11.1 37.45,15.09 35.23,15.09 34.35,14.21 Y1.3 34.2,14.28 C13.2
N$15
  Top 0.152: C18.1 53.43,12.11 R21.1
N$16
  Top 0.152: C17.1 53.68,16.89 R20.1
N$17
  Top 0.152: C15.1 53.43,6.91 R19.1
N$18
  Top 0.152: C20.1 68.11,8.38 R25.1
N$19
  Top 0.152: R24.1 59.76,4.03 60.12,4.03 60.85,3.3 C19.1
N$20
  Top 0.152: R26.2 R18.1 20.87,19.72 22.46,21.32 U7.3 25.57,21.57 26.17,21.57 26.83,22.23 C21.1
N$21  (via drill 0.35)
  Top 0.152: C22.1 27.43,24.13 26.17,22.87 25.57,22.87 U7.5 23.38,22.62 v23.24,22.48 | C28.1 25.95,17.65 27.6,19.3 C23.2 27.5,20.67 U7.2 U7.1 25.12,19.81 23.24,19.81 v22.86,20.19
  Bottom 0.152: v22.86,20.19 22.86,22.1 v23.24,22.48
N$22
  Top 0.152: U7.6 25.92,23.27 26.31,23.65 26.31,24.04 R27.2 26.29,27.8 SENS1.1
N$23
  Top 0.152: R28.2 21.47,22.87 21.22,22.62 U7.10 18.24,22.62 17.61,21.99 14.97,21.99 C24.1
N$24
  Top 0.152: U7.8 17.57,23.92 C26.2 | C26.2 R30.2 R31.1 14.64,26.16 R32.1 | C26.2 19.72,27.18 C27.1
N$25
  Top 0.152: R30.1 C26.1 17.52,23.27 U7.9
N$26
  Top 0.152: R28.1 23.08,26.26 C27.2 23.34,26.92 R29.2
N$27
  Top 0.152: LED3.A 20.73,12.08 R10.1
N$28
  Top 0.152: LED4.A 25.55,11.95 R33.1
N$29
  Top 0.152: IC2.2 40.77,27.04 40.27,26.54 38.98,26.54 38.47,27.05 R36.2
N$30
  Top 0.152: IC2.1 39.9,27.54 R37.1
N$34  (via drill 0.35)
  other vias: 72.26,13.97
RCAP
  Top 0.152: U6.44 49.99,13.59 50.51,13.59 51.27,14.35 C14.2
RESET  (via drill 0.35)
  Top 0.152: IC1.3 57.41,31.63 56.09,32.95 55.82,32.95 55.68,33.09 53,33.09 52.67,33.42 51.18,33.42 | 51.18,33.42 Q2.6 | R7.2 C7.1 22.66,8.85 S3.2 22.1,9.41 v22.1,11.05 | 51.18,33.42 51.18,29.34 50.7,28.86 48.39,28.86 48.04,29.21 45.97,29.21 45.47,29.72 39.62,29.72 v39.5,29.84
  Bottom 0.152: v39.5,29.84 39.5,26.92 38.99,26.42 29.97,26.42 23.9,20.35 23.9,12.86 v22.1,11.05
RIGHT  (via drill 0.35)
  Top 0.152: U6.39 50.36,10.95 50.64,10.67 50.64,9.47 R19.2 51.73,5.29 54.48,2.54 55.44,2.54 55.45,2.52 69.15,2.52 70.2,3.58 70.2,7.99 | R25.2 70.2,7.99 | v71.75,7.24 70.95,7.24 70.2,7.99
  Bottom 0.152: JP1.RING 73.04,8.53 v71.75,7.24
RTS
  Top 0.152: J1.2 37.48,33.16 48.5,33.16 48.75,33.42 Q2.1 49.23,33.2 49.43,33.2 49.86,32.77 Q2.5
RX  (via drill 0.35)
  Top 0.152: IC1.34 71.64,29.09 v71.63,29.08
  Bottom 0.152: J1.4 41.53,31.24 42.7,30.07 46.2,30.07 46.61,30.48 70.23,30.48 v71.63,29.08
SCK  (via drill 0.35)
  Top 0.152: v43.43,10.03 44.34,9.12 U6.28 | IC1.30 73.26,24.01 70.33,21.08 70.33,10.75 68.83,9.25 68.08,9.25 67.93,9.4 v63.63,9.4
  Bottom 0.152: v43.43,10.03 43.56,10.16 46.86,10.16 47.62,9.4 v63.63,9.4
SPKR-L
  Top 0.152: R22.1 C19.2
SPKR-R
  Top 0.152: R23.1 64.85,8.47 C20.2
TX  (via drill 0.35)
  Top 0.152: IC1.35 73.02,30.36 v72.64,30.73
  Bottom 0.152: J1.5 44.07,31.24 45.24,32.41 70.97,32.41 v72.64,30.73
V_BATT
  Top 0.508: PAD3.1 9.69,21.3 C6.1 4.71,20.17 4.71,17.37 5.4,16.69 IC4.3 5.4,14.41 4.27,13.29 Q1.3
V_USB
  Top 0.508: D5.1 4.34,9.11 C5.1 | C5.1 3.43,9.51 Q1.1 | IC4.4 6.99,18.06 R1.2 7.61,17.53 8.56,16.57 8.76,16.57 | 8.76,16.57 9.9,16.57 9.93,16.6 R3.2 11.05,16.52 12.01,15.57 12.01,12.01 9.1,9.11 C5.1 | D1.2 8.76,16.38 8.76,16.57
VOL  (via drill 0.35)
  Top 0.152: C29.1 R9.2 31.62,6.18 v31.62,6.99 | IC1.6 57.03,27.82 55.88,26.67 55.88,22.73 54.53,21.39 39.67,21.39 v39.5,21.21
  Bottom 0.152: v39.5,21.21 39.24,20.95 38.31,20.95 36.1,18.75 33.02,18.75 30.35,16.08 30.35,8.26 v31.62,6.99

## Text on the board
tSilk: measures v0.9 12/22 | programming | on/off | jen kutler | charging | power | playing | uploading | volume | boot | reset